# EAGLE board Interface_R1-0 (EAGLE 7.2.0)
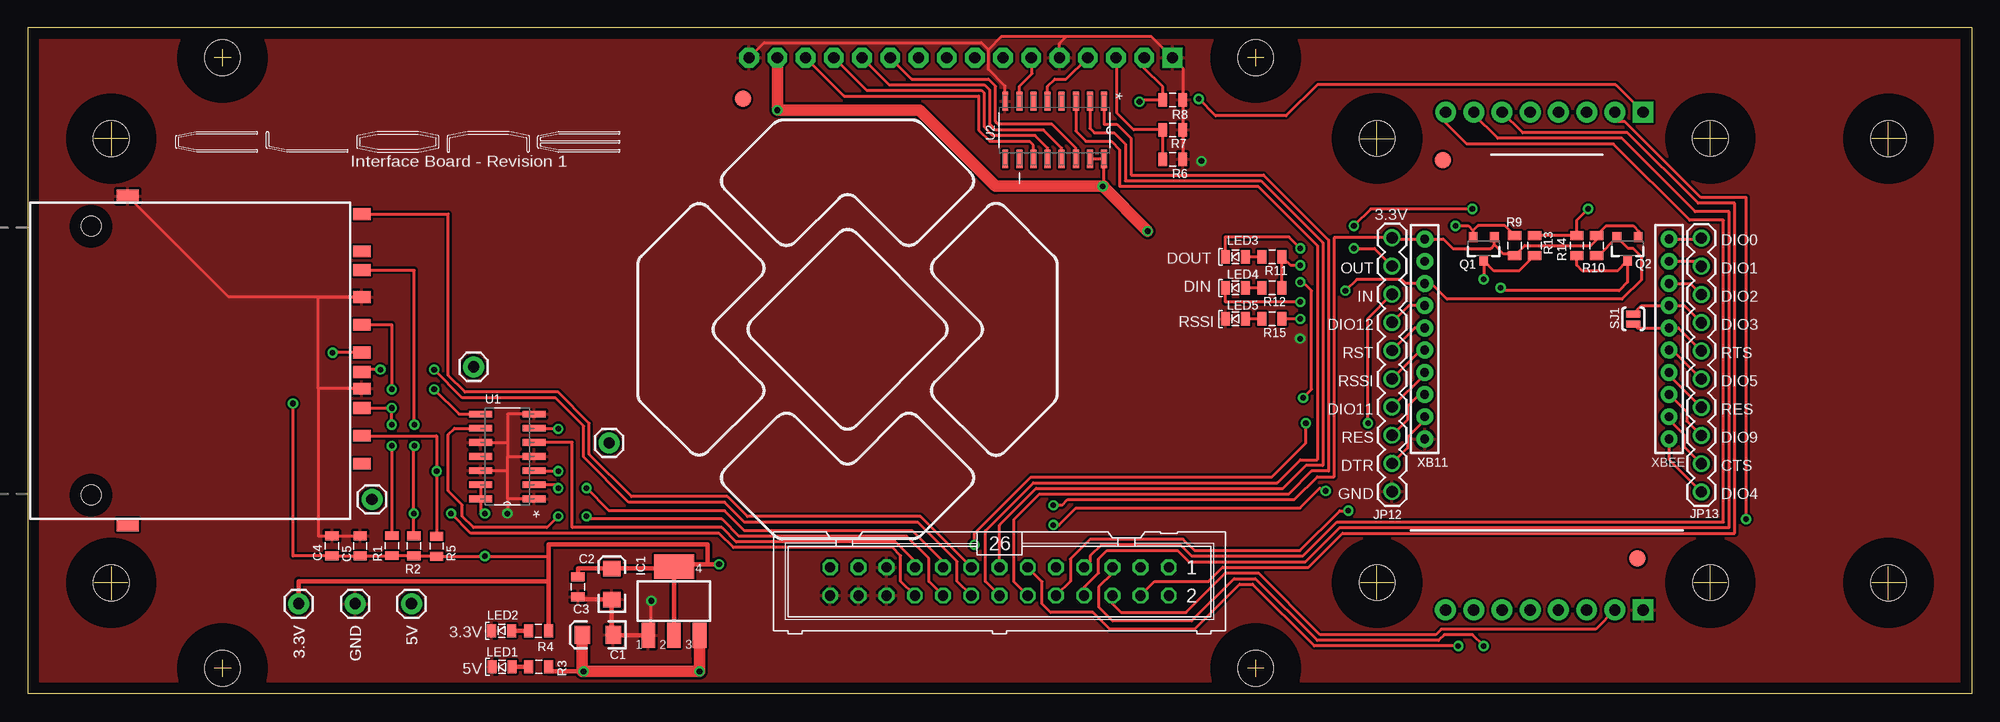
[diagram p0: board, top side]
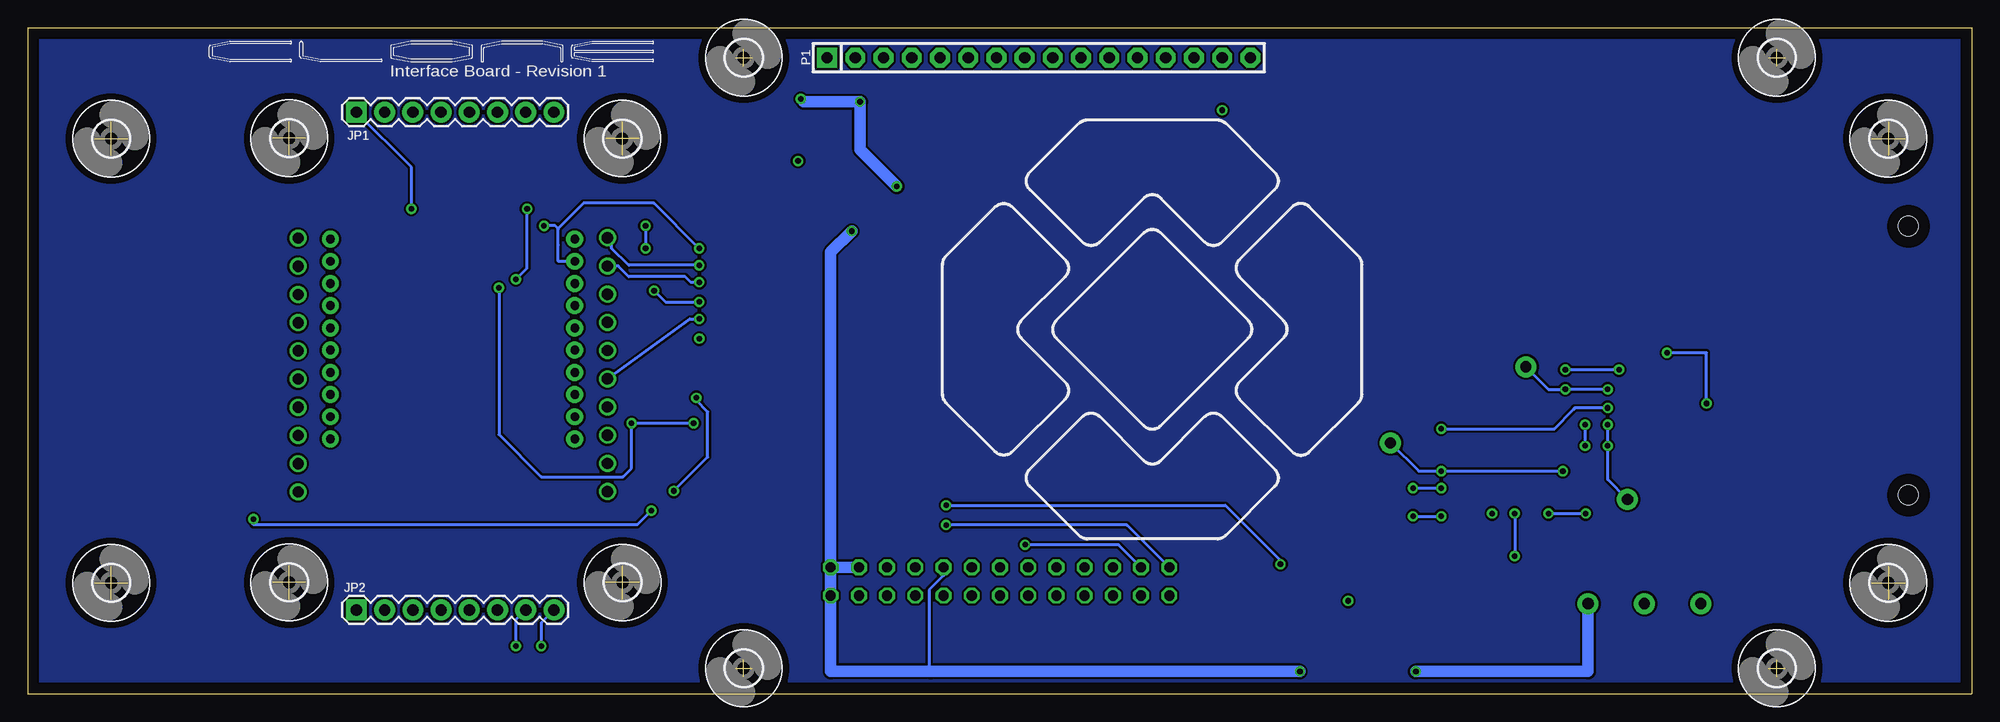
[diagram p1: board, bottom side, seen from below]

Size 175 x 60 mm. Coordinates in mm from the lower left corner, seen from the top.
Outline: 167.5,48.5 167.5,51.5
Outline: 169,50 166,50
Outline: 7.5,51.5 7.5,48.5
Outline: 9,50 6,50
Outline: 167.5,8.5 167.5,11.5
Outline: 169,10 166,10
Outline: 7.5,11.5 7.5,8.5
Outline: 9,10 6,10
Outline: 121.47,48.53 121.47,51.53
Outline: 119.97,50.03 122.97,50.03
Outline: 151.47,48.54 151.47,51.54
Outline: 149.97,50.04 152.97,50.04
Outline: 151.47,8.53 151.47,11.53
Outline: 149.97,10.03 152.97,10.03
Outline: 121.46,8.53 121.46,11.53
Outline: 119.96,10.03 122.96,10.03
Outline: 110.54,56.55 110.54,58.07
Outline: 111.3,57.31 109.78,57.31
Outline: 17.54,56.55 17.54,58.07
Outline: 18.3,57.31 16.78,57.31
Outline: 17.54,1.54 17.54,3.07
Outline: 18.3,2.31 16.78,2.31
Outline: 110.54,1.54 110.54,3.07
Outline: 111.3,2.31 109.78,2.31
Outline: 175,60 175,0 0,0 0,60 175,60
Copper layers (1*16): Top 0.035mm / dielectric 1.5mm / Bottom 0.035mm
Design rules "default": minimum track width 10mil, minimum drill 24mil, track to track 8mil, track to pad 8mil, pad to pad 8mil, via to via 8mil, smd to smd 8mil, copper to edge 40mil, drill to drill 8mil, minimum pad ring 10mil, minimum via ring 8mil, stop-mask expansion 4mil, vias tented up to drill 0mil, thermal gap 10mil
Net classes: 0 default: width 0.203 mm, drill 0.406 mm, clearance 0.178 mm; 1 24V: width 0.889 mm, drill 0.635 mm, clearance 0.508 mm

## Footprints (pad centres in the part's own frame; a part is rotated, then mirrored left to right if it is on the bottom)
1X01 = drill 1.016 pad 1.88: 1 0,0
3,2 = hole 3.2: 0,0
EIA3216 = smd 1.4 x 1.6: A 1.4,0; C -1.4,0
0805 = smd 0.8 x 1.2: 1 -0.9,0; 2 0.9,0
SDCARD_SMT_4U19646 = smd 1.05 x 1.56: CD 1.02,15.47; P$1 6.77,15.47; P$2 4.27,15.47; P$3 2.52,15.47; P$4 -0.73,15.47; P$5 -3.23,15.47; P$6 -5.73,15.47; P$7 -8.15,15.47; P$8 -9.85,15.47; P$9 9.27,15.47; WP -13.2,15.47 | smd 1.2 x 2: GND@1 14.8,-5.6; GND@2 -14.8,-5.6 | hole 1.8: -12.1,-8.9; 12.1,-8.9
SOT223 = smd 1.219 x 2.235: 1 -2.311,-3.099; 2 0,-3.099; 3 2.311,-3.099 | smd 3.6 x 2.2: 4 0,3.099
1X08 = drill 1.016 pad 1.88 square: 1 0,0 | drill 1.016 pad 1.88: 2 2.54,0; 3 5.08,0; 4 7.62,0; 5 10.16,0; 6 12.7,0; 7 15.24,0; 8 17.78,0
FIDUCIAL-1.5X3 = smd 1.5 x 1.5: 1 0,0
1X10 = drill 1.016: 1 0,0; 2 2.54,0; 3 5.08,0; 4 7.62,0; 5 10.16,0; 6 12.7,0; 7 15.24,0; 8 17.78,0; 9 20.32,0; 10 22.86,0
LED-0805 = smd 1.2 x 0.8: A 0,-0.9; C 0,0.9
SIP-100-16-40 = drill 1.016 pad 1.778 square: 1 -19.05,0 | drill 1.016 pad 1.778 octagon: 2 -16.51,0; 3 -13.97,0; 4 -11.43,0; 5 -8.89,0; 6 -6.35,0; 7 -3.81,0; 8 -1.27,0; 9 1.27,0; 10 3.81,0; 11 6.35,0; 12 8.89,0; 13 11.43,0; 14 13.97,0; 15 16.51,0; 16 19.05,0
SOT23-3 = smd 0.8 x 0.9: 1 -0.95,-1; 2 0.95,-1; 3 0,1.1
SJ_2S-NO = smd 0.635 x 1.27: 1 -0.45,0; 2 0.45,0
ML26 = drill 0.914 octagon: 1 -15.24,-1.27; 2 -15.24,1.27; 3 -12.7,-1.27; 4 -12.7,1.27; 5 -10.16,-1.27; 6 -10.16,1.27; 7 -7.62,-1.27; 8 -7.62,1.27; 9 -5.08,-1.27; 10 -5.08,1.27; 11 -2.54,-1.27; 12 -2.54,1.27; 13 0,-1.27; 14 0,1.27; 15 2.54,-1.27; 16 2.54,1.27; 17 5.08,-1.27; 18 5.08,1.27; 19 7.62,-1.27; 20 7.62,1.27; 21 10.16,-1.27; 22 10.16,1.27; 23 12.7,-1.27; 24 12.7,1.27; 25 15.24,-1.27; 26 15.24,1.27
SOIC127P600X175-14N = smd 2.057 x 0.61: 1 -4.801,7.62; 2 -4.801,6.35; 3 -4.801,5.08; 4 -4.801,3.81; 5 -4.801,2.54; 6 -4.801,1.27; 7 -4.801,0; 8 0,0; 9 0,1.27; 10 0,2.54; 11 0,3.81; 12 0,5.08; 13 0,6.35; 14 0,7.62
SOIC127P600X175-16N = smd 1.702 x 0.533: 1 -2.591,4.445; 2 -2.591,3.175; 3 -2.591,1.905; 4 -2.591,0.635; 5 -2.591,-0.635; 6 -2.591,-1.905; 7 -2.591,-3.175; 8 -2.591,-4.445; 9 2.591,-4.445; 10 2.591,-3.175; 11 2.591,-1.905; 12 2.591,-0.635; 13 2.591,0.635; 14 2.591,1.905; 15 2.591,3.175; 16 2.591,4.445
XBEE-SILK = drill 0.8 pad 1.524: 1 -11,20; 2 -11,18; 3 -11,16; 4 -11,14; 5 -11,12; 6 -11,10; 7 -11,8; 8 -11,6; 9 -11,4; 10 -11,2; 11 11,2; 12 11,4; 13 11,6; 14 11,8; 15 11,10; 16 11,12; 17 11,14; 18 11,16; 19 11,18; 20 11,20

## Placement (x,y rotation side)
3.3V  DNP  [1X01]  24.38,8.13 270 top
5V  DNP  [1X01]  34.54,8.13 270 top
$$U$111  [3,2]  17.54,57.31 0 bottom
C1  10uF  [EIA3216]  51.31,5.33 180 top
C2  10uF  [EIA3216]  52.58,9.91 90 top
C3  100nF  [0805]  49.53,9.65 270 top
C4  100nF  [0805]  27.38,13.33 270 top
C5  1uF  [0805]  29.92,13.33 270 top
CN1  4UCON  [SDCARD_SMT_4U19646]  14.61,30.02 270 top
GND  DNP  [1X01]  29.46,8.13 270 top
IC1  MC33269ST-3.3T3  [SOT223]  58.17,8.38 0 top
JP1  M081X08  [1X08]  145.42,52.4 0 bottom
JP2  M081X08  [1X08]  145.41,7.57 0 bottom
JP3  FIDUCIAL1.5X3  [FIDUCIAL-1.5X3]  64.39,53.59 0 top
JP4  DNP  [1X01]  40.13,29.46 0 top
JP5  DNP  [1X01]  30.99,17.53 0 top
JP9  DNP  [1X01]  52.32,22.61 0 top
JP10  FIDUCIAL1.5X3  [FIDUCIAL-1.5X3]  144.91,12.19 0 top
JP11  FIDUCIAL1.5X3  [FIDUCIAL-1.5X3]  127.38,48.08 0 top
JP12  [1X10]  122.82,41.08 270 top
JP13  [1X10]  150.66,41.06 270 top
LED1  GREEN  [LED-0805]  42.7,2.44 90 top
LED2  Blue  [LED-0805]  42.67,5.69 90 top
LED3  Red  [LED-0805]  108.71,39.37 90 top
LED4  Orange  [LED-0805]  108.71,36.58 90 top
LED5  Yellow  [LED-0805]  108.71,33.78 90 top
P1  M-1X16-SIP-100-40  [SIP-100-16-40]  83.99,57.31 0 bottom
Q1  MOSFET-NCHANNELSMD  [SOT23-3]  131.06,40.13 180 top
Q2  MOSFET-NCHANNELSMD  [SOT23-3]  144.02,40.13 180 top
R1  10K  [0805]  32.79,13.36 270 top
R2  10K  [0805]  34.75,13.33 270 top
R3  1k  [0805]  46,2.44 180 top
R4  1k  [0805]  45.97,5.69 180 top
R5  10K  [0805]  36.8,13.31 270 top
R6  DNP  [0805]  103.07,48.16 180 top
R7  2.2K  [0805]  103.07,50.81 180 top
R8  10K  [0805]  103.07,53.51 0 top
R9  1k  [0805]  133.86,40.39 270 top
R10  1k  [0805]  141.22,40.39 90 top
R11  1k  [0805]  112.01,39.37 180 top
R12  1k  [0805]  112.01,36.58 180 top
R13  1k  [0805]  135.64,40.39 90 top
R14  1k  [0805]  139.45,40.39 90 top
R15  1k  [0805]  112.01,33.78 0 top
SJ1  SOLDERJUMPERNO  [SJ_2S-NO]  144.53,33.78 90 top
SV1  26 Pin - Female  [ML26]  87.48,10.13 180 top
U1  SN74AHC125D  [SOIC127P600X175-14N]  40.77,25.2 180 top
U2  HEF4094BT  [SOIC127P600X175-16N]  92.44,50.78 270 top
U$100  [3,2]  110.54,2.31 0 bottom
U$101  [3,2]  17.54,2.31 0 bottom
U$102  [3,2]  167.5,10 0 bottom
U$103  [3,2]  151.48,10.04 0 bottom
U$104  [3,2]  121.47,10.03 0 bottom
U$105  [3,2]  7.51,10 0 bottom
U$106  [3,2]  167.5,50.01 0 bottom
U$107  [3,2]  151.47,50.04 0 bottom
U$108  [3,2]  121.48,50.03 0 bottom
U$109  [3,2]  7.51,50.01 0 bottom
U$110  [3,2]  110.54,57.31 0 bottom
XB11  XBEE  [XBEE-SILK]  136.75,20.97 0 top

## Library data of the parts
3.3V 5V GND JP4 JP5 JP9 = CB_R2
$$U$111 U$100-U$110 = holes
C1 C2 JP12 JP13 SJ1 = SparkFun
C3-C5 = SparkFun-Capacitors
CN1 = microbuilder
IC1 = linear
JP1 JP2 = SparkFun (2)
JP3 JP10 JP11 LED1-LED5 R1-R15 XB11 = CB_Main
P1 = con-headers-jp
Q1 Q2 = SparkFun-DiscreteSemi
SV1 = con-harting-ml; OC_FARNELL: unknown; OC_NEWARK: unknown
U1 = 1untitled; MPN: SN74AHC125D; OC_FARNELL: 1470770; OC_NEWARK: 76C1740; PACKAGE: 14-SOIC; SUPPLIER: Texas Instruments
U2 = 1untitled; MPN: HHEF4094BT; OC_FARNELL: 1201297; OC_NEWARK: 25M9623; PACKAGE: SOIC-16; SUPPLIER: NXP

## Nets
2560-MISO: CN1.P$7 R2.1 SV1.20
+3V3: 3.3V.1 C2.A C3.1 C4.2 C5.2 CN1.P$4 IC1.2 IC1.4 JP12.1 Q1.1 Q2.1 R1.2 R2.2 R4.1 R5.2 R9.2 R10.2 R11.1 R12.1 U1.13 U1.14 XB11.1
+5V: 5V.1 C1.A IC1.3 JP1.1 P1.2 P1.15 R3.1 R8.1 R13.2 R14.2 SV1.1 SV1.2 SV1.3 SV1.9 U2.15 U2.16
BT-IN: LED4.C Q2.2 R10.1 XB11.3
BT-OUT: LED3.C Q1.2 R9.1 XB11.2
BT-RX: JP12.3 Q2.3 R14.1 SV1.23
BT-TX: JP12.2 Q1.3 R13.1 SV1.25
CENTRE: JP1.7 SV1.8
CS: CN1.P$1 JP9.1 R5.1 U1.3
CTS: JP13.9 XB11.12
DB4: P1.11 U2.14
DB5: P1.12 U2.13
DB6: P1.13 U2.12
DB7: P1.14 U2.11
DI: CN1.P$2 JP5.1 R1.1 U1.6
DIO0: JP13.1 XB11.20
DIO1: JP13.2 XB11.19
DIO2: JP13.3 XB11.18
DIO3: JP13.4 SJ1.2 XB11.17
DIO4: JP13.10 XB11.11
DIO5: JP13.6 XB11.15
DIO9: JP13.8 XB11.13
DIO11: JP12.7 XB11.7
DIO12: JP12.4 XB11.4
DOWN: JP2.7 SV1.5
DTR: JP12.9 XB11.9
E: P1.6 U2.7
GLED: JP1.2 SV1.10
GND: C1.C C2.C C3.2 C4.1 C5.1 CN1.GND@2 CN1.P$3 CN1.P$6 GND.1 IC1.1 JP2.1 JP12.10 LED1.C LED2.C LED5.C P1.1 P1.5 P1.16 R6.1 R7.1 R8.2 SV1.21 SV1.22 SV1.24 SV1.26 U1.1 U1.4 U1.7 U1.10 U1.12 U2.8 XB11.10
LCD-CLK: SV1.14 U2.3
LCD-DATA: SV1.13 U2.2
LCD-STROBE: SV1.12 U2.1
LEFT: JP2.2 SV1.6
N$3: LED1.A R3.2
N$4: LED2.A R4.2
N$468: LED3.A R11.2
N$469: LED4.A R12.2
N$470: LED5.A R15.1
N$1062: P1.3 R6.2 R7.2
RES1: JP12.8 XB11.8
RES2: JP13.7 XB11.14
RESET: JP12.5 XB11.5
RIGHT: JP1.8 SV1.7
RLED: JP2.8 SV1.11
RS: P1.4 U2.5
RSSI: JP12.6 R15.2 XB11.6
RTS: JP13.5 SJ1.1 XB11.16
SCK: CN1.P$5 JP4.1 U1.8
SD-CD: CN1.CD SV1.16
SD-CS: SV1.17 U1.2
SD-MOSI: SV1.19 U1.5
SD-SCK: SV1.18 U1.9
SD-WP: CN1.WP SV1.15
UP: JP1.6 SV1.4

## Tracks (layer width: path | path; a pad name or v marks a point on that pad's centre or on a via)
2560-MISO  (via drill 0.51)
  Top 0.254: SV1.20 78.59,10.13 78.59,12.45 77.85,13.18 63.53,13.18 62.23,14.48 39.88,14.48 v38.1,16.26 | CN1.P$7 34.8,38.17 v34.8,24.26 | R2.1 v34.75,16.26 34.75,22.35 v34.8,22.35
  Bottom 0.254: v34.8,22.35 v34.8,24.26 | v38.1,16.26 v34.75,16.26
+3V3  (via drill 0.51)
  Top 0.254: v92.33,16.99 93.09,16.99 93.6,17.5 114.02,17.5 116.08,19.56 117.6,19.56 117.6,41.08 JP12.1 122.82,40.97 XB11.1 127.43,40.97 128.27,40.13 131.69,40.13 132.01,40.45 | 46.87,12.45 46.87,12.41 v41.15,12.41 R5.2 36.8,12.43 R2.2 34.75,12.46 R1.2 32.79,12.43 C5.2 C4.2 23.88,12.43 v23.88,26.16 | U1.13 U1.14 40.77,16.26 v41.15,16.26 | CN1.P$4 27.43,30.75 v27.43,30.73 | 132.01,40.45 132.84,39.62 133.72,39.62 R9.2 134.76,40.39 140.72,40.39 141.22,40.89 R10.2 142.1,42.16 144.53,42.16 145.03,41.66 145.03,41.2 Q2.1 | 132.01,40.45 Q1.1 | R12.1 R11.1 113.68,38.61 v114.55,38.61
  Top 0.406: C3.1 49.53,11.31 C2.A 58.17,11.31 IC1.4 | IC1.2 IC1.4 | v62.23,11.68 61.21,11.68 | 61.21,11.68 58.17,11.68 IC1.4 | 61.21,11.68 61.21,13.46 46.87,13.46 46.87,12.45 46.87,10.16 | 46.87,10.16 R4.1 | 3.3V.1 24.38,10.16 46.87,10.16
  Bottom 0.254: v23.88,26.16 23.88,30.73 v27.43,30.73 | v41.15,16.26 v41.15,12.41 | v114.55,38.61 120.9,38.61 122.43,40.13 122.43,40.69 JP12.1 | v62.23,11.68 62.23,12.04 67.18,16.99 v92.33,16.99
+5V  (via drill 0.51)
  Top 0.254: U2.15 U2.16 96.88,45.72 | P1.2 100.5,56.34 102.17,54.67 R8.1 100.08,53.5 v100.08,53.34 | v105.41,53.59 106.93,52.07 113.28,52.07 116.08,54.86 142.95,54.86 JP1.1 | R13.2 R14.2 139.45,42.67 v140.46,43.69
  Top 0.406: 49.91,2.03 46.9,2.03 R3.1
  Top 1.016: 60.48,3.3 IC1.3 v60.48,2.03 v50.04,2.03 49.91,2.03 C1.A | P1.15 v67.48,52.58 80.26,52.58 87.12,45.72 v96.77,45.72 | 96.88,45.72 v96.77,45.72 | v100.81,41.68 v96.77,45.72
  Bottom 0.254: SV1.9 92.56,10.67 93.85,9.37 93.85,2.16 93.72,2.03 | v105.41,53.59 105.16,53.34 | v140.46,43.69 140.46,47.44 JP1.1
  Bottom 1.016: SV1.3 SV1.1 | SV1.1 SV1.2 102.72,2.03 93.72,2.03 v60.48,2.03 | v96.77,45.72 100.08,49.02 v100.08,53.34 105.16,53.34 | 5V.1 34.54,2.03 v50.04,2.03 | SV1.1 102.72,39.78 v100.81,41.68
BT-IN  (via drill 0.51)
  Top 0.254: R10.1 141.42,39.49 Q2.2 144.07,40.13 144.53,40.13 145.29,39.37 145.29,37.34 143.51,35.56 127.76,35.56 126.35,36.97 XB11.3 124.07,36.97 123.7,37.34 119.63,37.34 v118.62,36.32 | v114.55,35.31 107.81,35.31 LED4.C
  Bottom 0.254: v118.62,36.32 117.6,35.31 v114.55,35.31
BT-OUT  (via drill 0.51)
  Top 0.254: R9.1 132.98,42.16 130.56,42.16 130.11,41.72 | 130.11,41.72 Q1.2 | v128.52,42.16 129.67,42.16 130.11,41.72 | LED3.C 107.81,41.15 113.54,41.15 v114.55,40.13
  Bottom 0.254: 127.25,41.91 127.25,40.47 127.25,38.97 XB11.2 | 127.25,41.91 127.51,42.16 v128.52,42.16 | 127.25,41.91 124.97,44.2 118.62,44.2 v114.55,40.13
BT-RX  (via drill 0.51)
  Top 0.254: R14.1 139.45,38.61 139.95,38.1 143.09,38.1 Q2.3 144.02,37.08 143.26,36.32 132.59,36.32 v132.59,36.58 | v85.22,13.44 85.22,14.45 90.3,19.53 111.99,19.53 115.06,22.61 v115.06,24.38 | v120.65,24.38 120.65,33.83 JP12.3
  Bottom 0.254: SV1.23 76.81,13.44 v85.22,13.44 | v115.06,24.38 v120.65,24.38 120.65,20.32 121.41,19.56 128.78,19.56 132.59,23.37 v132.59,36.58
BT-TX  (via drill 0.51)
  Top 0.254: R13.1 134.25,38.1 132,38.1 Q1.3 v131.06,37.34 | v130.05,43.69 120.9,43.69 v119.38,42.16 | v119.38,40.13 121.23,40.13 JP12.2 | v92.33,15.21 92.84,15.21 94.36,16.74 114.53,16.74 116.33,18.54 116.59,18.29 v116.84,18.29 | v114.81,26.67 115.57,27.43 115.57,36.32 114.81,37.08 v114.55,37.08
  Bottom 0.254: v131.06,37.34 130.05,38.35 v130.05,43.69 | v119.38,42.16 v119.38,40.13 | SV1.25 76.05,15.21 v92.33,15.21 | v116.84,18.29 113.79,21.34 113.79,25.4 114.81,26.42 v114.81,26.67 | JP12.2 121.86,38.54 120.9,37.59 115.82,37.59 115.32,37.08 v114.55,37.08
CENTRE
  Top 0.254: SV1.8 95.12,8.89 95.12,9.63 96.39,10.9 96.39,12.17 97.15,12.93 103.5,12.93 104.52,11.91 115.04,11.91 118.11,14.99 153.16,14.99 153.16,43.43 150.11,43.43 143.51,50.04 132.33,50.04 130.18,52.19 JP1.7
CS  (via drill 0.51)
  Top 0.254: CN1.P$1 36.8,23.25 v36.8,20.07 R5.1 | 45.52,20.07 v47.75,20.07 | 45.06,20.07 45.52,20.07 | 45.52,20.07 arc90 U1.3
  Bottom 0.254: v36.8,20.07 v47.75,20.07 49.78,20.07 JP9.1
CTS
  Top 0.254: XB11.12 147.75,24.71 149.1,23.37 149.1,22.3 JP13.9
DB4
  Top 0.254: P1.11 79.58,55.37 86.49,55.37 87.12,54.74 87.12,51.56 87.38,51.31 92.2,51.31 94.34,49.17 U2.14
DB5
  Top 0.254: P1.12 77.55,54.86 86.11,54.86 86.61,54.36 86.61,51.31 87.12,50.8 91.44,50.8 93.07,49.17 U2.13
DB6
  Top 0.254: P1.13 75.52,54.36 85.85,54.36 86.11,54.1 86.11,51.05 86.87,50.29 90.68,50.29 91.8,49.17 U2.12
DB7
  Top 0.254: P1.14 73.48,53.85 85.6,53.85 85.6,50.8 86.61,49.78 90.17,49.78 90.53,49.42 U2.11
DI  (via drill 0.51)
  Top 0.254: R1.1 32.79,22.35 v32.77,22.35 | v32.77,24.26 v32.77,25.75 CN1.P$2 | U1.6 47.75,23.93 v47.75,23.88
  Bottom 0.254: v32.77,24.26 v32.77,22.35 32.77,19.3 JP5.1 | v47.75,23.88 37.59,23.88 35.81,25.65 arc90 35.72,25.75 v32.77,25.75
DIO0
  Top 0.254: XB11.20 150.57,40.97 JP13.1
DIO1
  Top 0.254: XB11.19 150.21,38.97 JP13.2
DIO2
  Top 0.254: XB11.18 149.67,36.97 JP13.3
DIO3
  Top 0.254: JP13.4 149.13,34.97 XB11.17 145.26,34.97 SJ1.2
DIO4
  Top 0.254: XB11.11 147.75,21.11 JP13.10
DIO5
  Top 0.254: XB11.15 148.05,30.97 JP13.6
DIO9
  Top 0.254: XB11.13 147.78,26.97 149.35,25.4 149.35,24.59 JP13.8
DIO11
  Top 0.254: XB11.7 125.75,28.78 JP12.7
DIO12
  Top 0.254: XB11.4 124.32,34.97 JP12.4
DOWN  (via drill 0.51)
  Top 0.254: SV1.5 97.64,10.87 96.39,9.63 96.39,7.85 97.66,6.58 104.77,6.58 108.58,10.39 110.52,10.39 116.08,4.83 127,4.83 127.51,5.33 130.05,5.33 v131.06,4.32
  Bottom 0.254: JP2.7 131.06,6.67 v131.06,4.32
DTR
  Top 0.254: XB11.9 125.75,24.66 124.21,23.11 124.21,22.15 JP12.9
E
  Top 0.254: U2.7 89.26,54.72 90.42,55.88 90.42,57.23 P1.6
GLED  (via drill 0.51)
  Top 0.254: SV1.10 93.85,10.16 93.85,12.17 95.63,13.94 104.01,13.94 105.03,12.93 114.53,12.93 118.11,16.51 v118.87,16.51 | v154.69,15.75 154.69,44.7 150.62,44.7 143.76,51.56 143,51.56 142.88,51.69 JP1.2
  Bottom 0.254: v118.87,16.51 120.14,15.24 154.69,15.24 v154.69,15.75
GND  (via drill 0.51)
  Top 0.254: P1.16 66.29,58.67 85.85,58.67 86.49,58.04 | U2.8 87.99,54.75 86.49,56.26 86.49,58.04 | 93.47,59.18 101.17,59.18 P1.1 103.97,56.38 R8.2 R7.1 R6.1 | 93.47,59.18 87.63,59.18 86.49,58.04 | 26.16,27.5 26.16,35.75 CN1.P$6 18.07,35.75 CN1.GND@2 | CN1.P$3 26.16,27.5 | 26.16,27.5 26.16,14.22 27.38,14.22 C4.1 C5.1 | U1.7 43.18,25.2 43.18,22.61 | 43.18,22.61 40.77,22.61 U1.10 | 43.18,22.61 43.18,21.39 | 43.18,21.39 U1.4 | U1.12 43.18,20.12 | 43.18,20.12 43.18,21.39 | U1.1 43.18,17.58 | 43.18,17.58 43.18,20.12 | 43.18,17.58 v43.18,16.26 | IC1.1 56.13,5.28 v56.13,8.38 | P1.5 92.88,58.6 93.47,59.18
  Top 0.406: IC1.1 52.71,5.28 C1.C 52.58,5.33 C2.C 49.53,8.51 C3.2 | LED2.C 41.83,5.64
  other vias: 105.66,48 114.55,32
  pour Top: -0.25,-0.25 -0.25,60.2 175.26,60.2 175.26,-0.25
LCD-CLK
  Top 0.254: SV1.14 86.21,10.13 86.21,14.71 90.53,19.02 112.5,19.02 114.55,21.08 116.08,21.08 116.08,40.39 110.74,45.72 98.3,45.72 98.3,49.02 97.54,49.78 95.25,49.78 94.34,50.69 U2.3
LCD-DATA
  Top 0.254: SV1.13 87.48,15.21 90.78,18.52 113,18.52 115.06,20.57 116.59,20.57 116.59,40.64 111,46.23 98.81,46.23 98.81,49.53 97.79,50.55 96.01,50.55 95.61,50.94 U2.2
LCD-STROBE
  Top 0.254: SV1.12 88.75,10.13 88.75,15.7 91.06,18.01 113.51,18.01 115.57,20.07 117.09,20.07 117.09,40.89 111.25,46.74 99.31,46.74 99.31,50.04 98.04,51.31 96.88,51.31 U2.1
LEFT
  Top 0.254: SV1.6 97.64,8.13 98.42,7.34 104.27,7.34 107.82,10.9 110.77,10.9 116.33,5.33 126.75,5.33 127.25,5.84 141.15,5.84 JP2.2
N$1
  pour Bottom: -0.25,-0.25 -0.25,60.2 175.26,60.2 175.26,-0.25
N$3
  Top 0.406: R3.2 LED1.A
N$4
  Top 0.406: R4.2 LED2.A
N$468
  Top 0.254: R11.2 LED3.A
N$469
  Top 0.254: R12.2 LED4.A
N$470
  Top 0.254: R15.1 LED5.A
N$1062
  Top 0.254: R6.2 R7.2 99.56,50.81 98.04,52.32 98.04,57.23 P1.3
RES1
  Top 0.254: XB11.8 125.27,26.97 124.21,25.91 124.21,24.69 JP12.8
RES2
  Top 0.254: XB11.14 147.75,28.73 JP13.7
RESET
  Top 0.254: XB11.5 124.86,32.97 JP12.5
RIGHT
  Top 0.254: SV1.7 95.63,11.94 95.63,12.42 96.65,13.44 103.76,13.44 104.77,12.42 114.78,12.42 117.86,15.49 152.65,15.49 152.65,42.67 149.61,42.67 142.75,49.53 129.54,49.53 127.64,51.43 JP1.8
RLED  (via drill 0.51)
  Top 0.254: SV1.11 91.31,10.11 91.31,8.1 92.07,7.34 95.88,7.34 97.41,5.82 105.03,5.82 109.09,9.88 110.26,9.88 115.82,4.32 v128.78,4.32
  Bottom 0.254: JP2.8 128.78,6.42 v128.78,4.32
RS
  Top 0.254: U2.5 91.8,54.72 92.46,55.37 93.48,55.37 P1.4
RSSI  (via drill 0.51)
  Top 0.254: XB11.6 125.4,30.97 JP12.6 | v114.55,33.78 R15.2
  Bottom 0.254: JP12.6 115.39,33.78 v114.55,33.78
RTS
  Top 0.254: JP13.5 148.59,32.97 XB11.16 144.89,32.97 SJ1.1
SCK  (via drill 0.51)
  Top 0.254: CN1.P$5 32.77,33.25 v32.77,27.43 | v36.58,27.43 38.81,25.2 U1.8
  Bottom 0.254: v32.77,27.43 v36.58,27.43 38.1,27.43 JP4.1
SD-CD  (via drill 0.51)
  Top 0.254: SV1.16 83.67,10.13 83.67,11.94 80.14,15.47 64.54,15.47 62.74,17.27 54.1,17.27 50.04,21.34 50.04,24.13 47.5,26.67 39.12,26.67 v36.58,29.21 | v31.75,29.21 30.28,29.21 CN1.CD
  Bottom 0.254: v36.58,29.21 v31.75,29.21
SD-CS  (via drill 0.51)
  Top 0.254: SV1.17 82.4,11.94 79.63,14.71 64.54,14.71 62.74,16.51 52.32,16.51 v50.29,18.54 | v47.75,18.54 47.45,18.85 U1.2
  Bottom 0.254: v50.29,18.54 v47.75,18.54
  other vias: 82.4,11.4
SD-MOSI  (via drill 0.51)
  Top 0.254: SV1.19 79.86,11.94 78.1,13.69 63.78,13.69 62.48,14.99 49.02,14.99 49.02,22.66 U1.5
  other vias: 79.86,11.4
SD-SCK  (via drill 0.51)
  Top 0.254: SV1.18 81.13,10.13 81.13,12.19 79.12,14.2 64.03,14.2 62.48,15.75 50.55,15.75 v50.29,16 | v47.75,16 46.74,14.99 40.13,14.99 39.12,16 39.12,17.02 37.85,18.29 37.85,23.37 38.4,23.93 U1.9
  Bottom 0.254: v50.29,16 v47.75,16
SD-WP
  Top 0.254: CN1.WP 37.85,43.22 37.85,28.7 39.37,27.18 47.75,27.18 50.55,24.38 50.55,21.59 54.36,17.78 62.99,17.78 64.8,15.98 80.37,15.98 SV1.15
UP
  Top 0.254: SV1.4 101.45,10.13 106.3,10.13 107.57,11.4 115.29,11.4 118.36,14.48 153.67,14.48 153.67,44.2 150.37,44.2 144.02,50.55 134.57,50.55 JP1.6

## Text on the board
tPlace: Interface Board - Revision 1 | 3.3V | DOUT | DIO0 | OUT | DIO1 | DIN | IN | DIO2 | RSSI | DIO12 | DIO3 | RST | RTS | RSSI | DIO5 | DIO11 | RES | RES | DIO9 | DTR | CTS | GND | DIO4 | 3.3V | 5V
bPlace: Interface Board - Revision 1
_tPlace: 3.3V | GND | 5V
_tNames: R8 | U2 | R7 | R6 | R9 | R13 | LED3 | R11 | Q1 | R14 | R10 | Q2 | LED4 | R12 | LED5 | R15 | SJ1 | U1 | XB11 | JP12 | JP13 | C2 | C4 | C5 | R1 | R2 | R5 | IC1 | C3 | LED2 | R4 | C1 | LED1 | R3
_bNames: P1 | JP1 | JP2